# Altium PCB PCB1.PcbDoc
Units mm, origin at the board's own origin, x right, y up, seen from the top; angles counter-clockwise.
Board outline 64.64 x 85.47 mm, 2 copper layers (Top Layer, Bottom Layer); 9 components, 18 nets, 63 pads, 0 vias.
Unrouted connection lines stored in the file: 2.
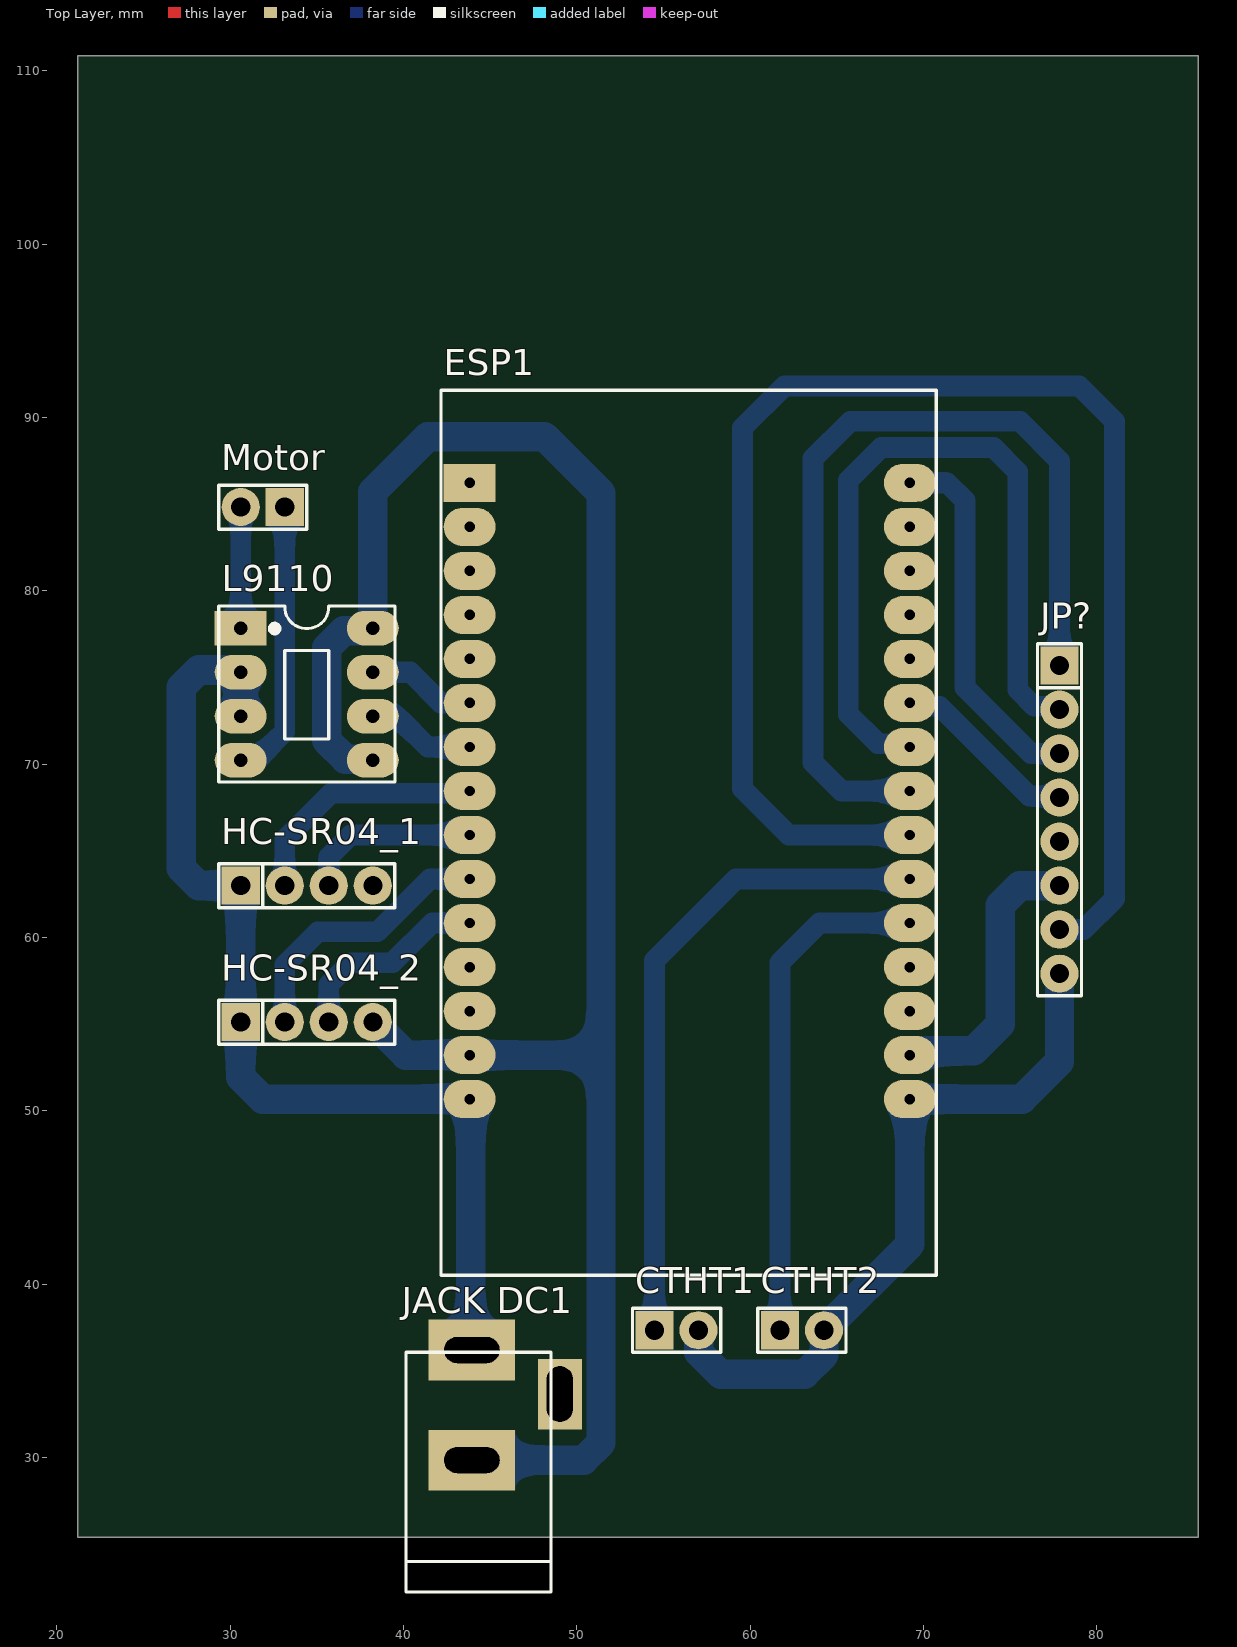
[diagram p0: Top Layer view]
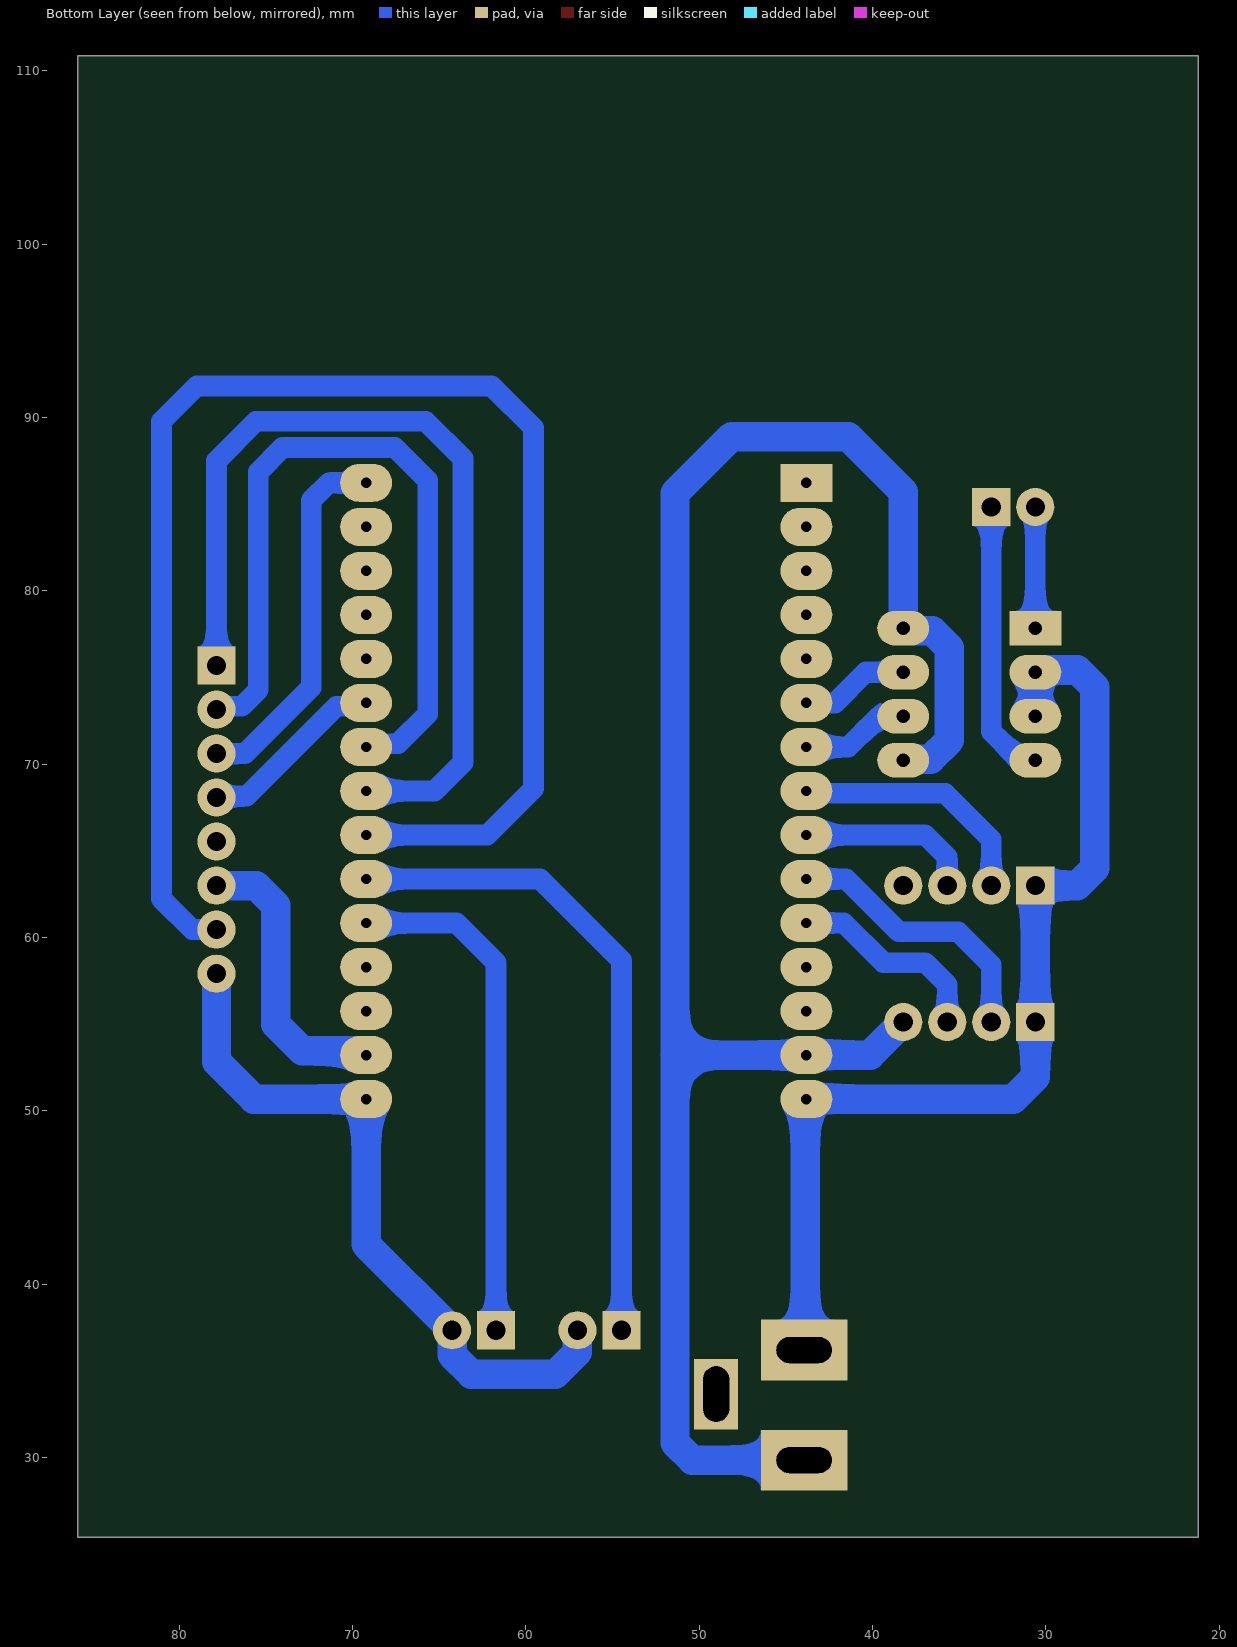
[diagram p1: Bottom Layer view, seen from below]
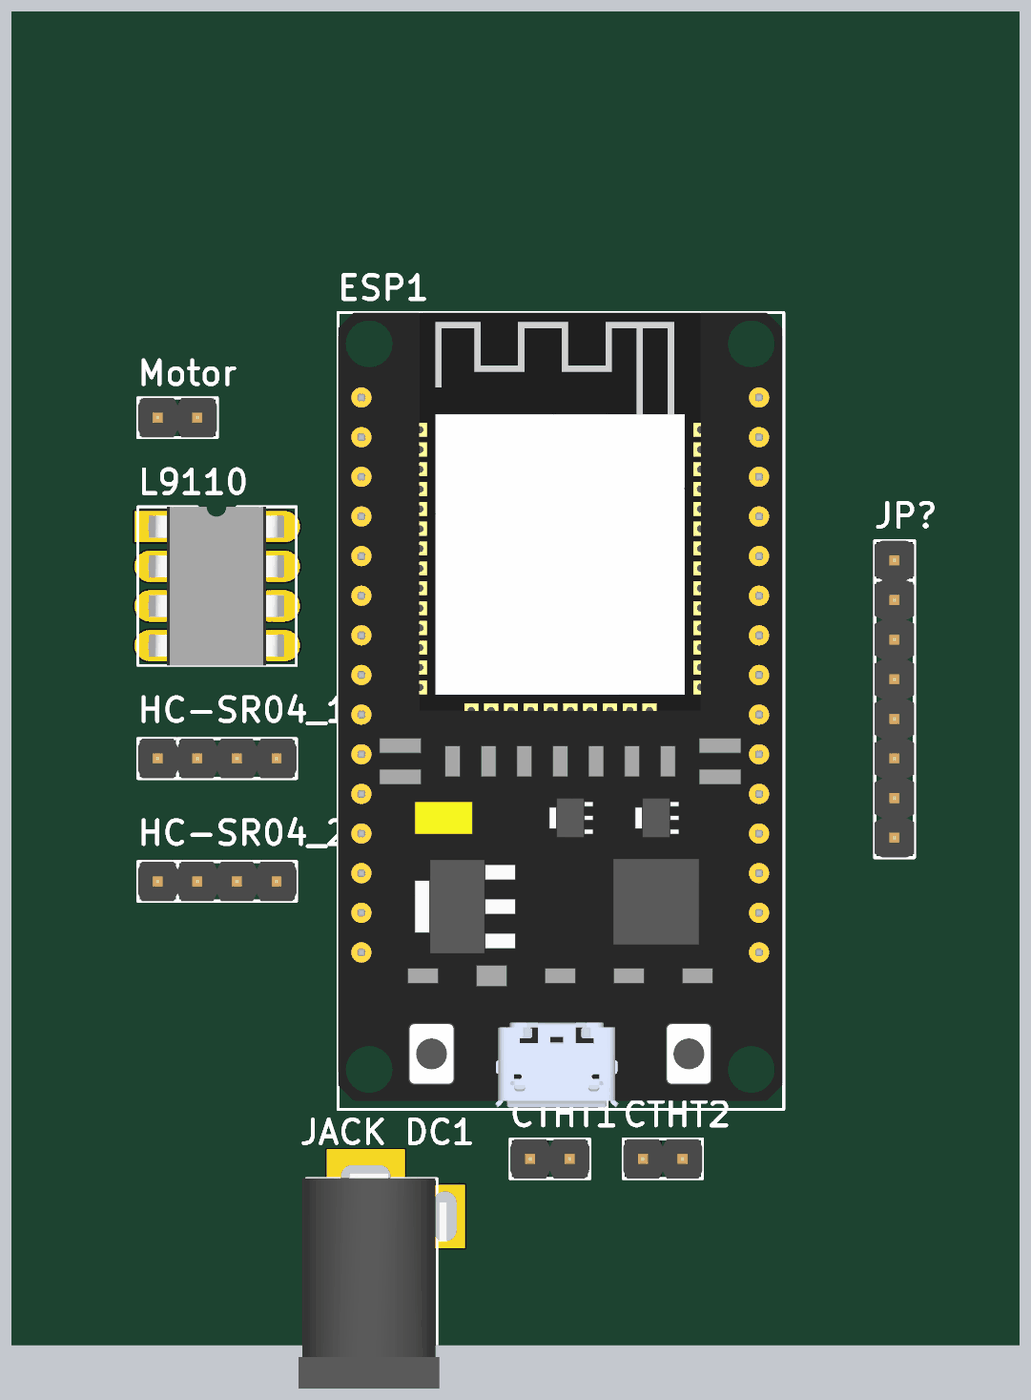
[diagram p2: 3D render of the assembled board from above, using the file's embedded part models]

## Layer stack, top to bottom
Top Solder: solder mask 0.0102, Solder Resist, Dk 3.5
Top Layer: signal copper 0.0356
Dielectric 1: dielectric 0.32, FR-4, Dk 4.8
Bottom Layer: signal copper 0.0356
Bottom Solder: solder mask 0.0102, Solder Resist, Dk 3.5

## Board outline
21.209,25.4 85.852,25.4 85.852,110.871 21.209,110.871

## Design rules (kind name [scope] priority, off if disabled: settings)
Clearance [All] p1: gap=0.254 ignorepadtopadclearanceinfootprint=FALSE except(0: Arc-Hole Track-Hole SMDPad-Hole THPad-Hole Via-Hole Fill-Hole Poly-Hole Region-Hole Text-Hole)
PolygonConnect [All] p1: connectstyle=Relief reliefconductorwidth=0.254 reliefentries=4 polygonreliefangle="90 Angle" airgapwidth=0.254
RoutingVias [All] p1: holewidth=0.711 width=1.27 viastyle="Through Hole" minholewidth=0.711 minwidth=1.27 maxholewidth=0.711 maxwidth=1.27
SolderMaskExpansion [All] p1: expansion=0.102 istentingtop=FALSE
Width [All] p1: maxlimit=1.7 minlimit=0.254 preferedwidth=1.5 toplayer_maxwidth=0.254 toplayer_prefwidth=0.254 bottomlayer_minwidth=1.2 minimp=50.000000 maximp=50.000000 favimp=50.000000
30 further rules are at their usual default settings.

## Components (designator, comment, footprint, x,y, rotation, side; value= is the part's Value field where it differs from the comment)
CTHT1 "CTHT1" "JP 1x2 DT" 54.483,37.338 r0 top
CTHT2 "CTHT2" "JP 1x2 DT" 61.722,37.338 r0 top
ESP1 "ESP32 DEVKIT" "ESP32 WROOM 32 KIT" 43.815,86.233 r0 top
HC-SR04_1 "HC-SR04_1" "JP 1x4 DT" 30.607,62.992 r0 top
HC-SR04_2 "HC-SR04_2" "JP 1x4 DT" 30.607,55.118 r0 top
"JACK DC1" "JACK DC 5.5" "JACK DC 5.5" 46.482,33.02 r90 top value="Jac DC"
JP? "JP 1x8 2.54" "JP 1x8 DT" 77.851,75.692 r270 top
L9110 "DIP8" DIP8/W0.3 30.607,77.851 r270 top
Motor "Motor" "JP 1x2 DT" 33.147,84.836 r180 top

## Footprints (in the part's own frame and the unit in brackets; to place one, negate y for a bottom-side part, rotate by r counter-clockwise, add the part's x,y. Pads: shape width x height; smd on the part's side, far side on the other; paste and mask are expansions set on the pad)
DIP8/W0.3 [mm] "8 PIN, W 300mil, Pin to pin 100mil"
  rect 2x3 hole 0.787: 1(0,0)
  oval 2x3 hole 0.787: 2(2.54,0) 3(5.08,0) 4(7.62,0) 5(7.62,7.62) 6(5.08,7.62) 7(2.54,7.62) 8(0,7.62)
  silkscreen extent -1.28,-1.27 8.89,8.89, body extent -1.27,-1.02 8.89,8.54, height 5.11
"ESP32 WROOM 32 KIT" [mm]
  rect 3x2.2 hole 0.6: 1(0,0)
  oval 3x2.2 hole 0.6: 2(0,-2.54) 3(0,-5.08) 4(0,-7.62) 5(0,-10.16) 6(0,-12.7) 7(0,-15.24) 8(0,-17.78) 9(0,-20.32) 10(0,-22.86) 11(0,-25.4) 12(0,-27.94) 13(0,-30.48) 14(0,-33.02) 15(0,-35.56) 16(25.4,-35.56) 17(25.4,-33.02) 18(25.4,-30.48) 19(25.4,-27.94) 20(25.4,-25.4) 21(25.4,-22.86) 22(25.4,-20.32) 23(25.4,-17.78) 24(25.4,-15.24) 25(25.4,-12.7) 26(25.4,-10.16) 27(25.4,-7.62) 28(25.4,-5.08) 29(25.4,-2.54) 30(25.4,0)
  silkscreen extent -1.65,-45.72 26.92,5.33, body extent -1.65,-45.6 26.85,5.33, height 10.49
"JACK DC 5.5" [mm] "Jac DC input"
  rect 3.5x5 hole 1.5 slot 3.2 at 90 deg: 1(3.175,2.54) 2(-3.175,2.54)
  rect 4.064x2.54 hole 1.5 slot 3.2 at 0 deg: 3(0.635,-2.54)
  silkscreen extent -10.79,-2.03 3.05,6.35, body extent -10.42,-2.67 3.4,6.84, height 11.02
"JP 1x2 DT" [mm] "2 pins, 1 row, straight, gold plating"
  rect 2.2x2.2 hole 1.1: 1(0,0)
  round 2.2 hole 1.1: 2(2.54,0)
  silkscreen extent -1.27,-1.27 3.81,1.27, body extent -1.27,-1.27 3.81,1.27, height 8.54
"JP 1x4 DT" [mm] "4 pins, 1 row, straight, gold plating"
  rect 2.2x2.2 hole 1.1: 1(0,0)
  round 2.2 hole 1.1: 2(2.54,0) 3(5.08,0) 4(7.62,0)
  silkscreen extent -1.27,-1.27 8.89,1.27, body extent -1.27,-1.27 8.89,1.27, height 8.54
"JP 1x8 DT" [mm] "8 pins, 1 row, straight, gold plating"
  rect 2.2x2.2 hole 1.1: 1(0,0)
  round 2.2 hole 1.1: 2(2.54,0) 3(5.08,0) 4(7.62,0) 5(10.16,0) 6(12.7,0) 7(15.24,0) 8(17.78,0)
  silkscreen extent -1.27,-1.27 19.05,1.27, body extent -1.27,-1.27 19.05,1.27, height 8.54

## Part data
CTHT1 CTHT2 Motor: library part "JP 1x2 2.54 Duc Thang", "Cắm", Chung_Loai=Cắm, Don_Vi=Con, Ma_Hang=MH000903, Ten_Linh_Kien="Jump Đơn Đực 2.54MM 1x40P Thẳng 11MM"
ESP1: library part "ESP32 WROOM 32 KIT"
HC-SR04_1 HC-SR04_2: library part "JP 1x4 2.54 Duc Thang", "Cắm", Chung_Loai=Cắm, Don_Vi=Con, Ma_Hang=MH000903, Ten_Linh_Kien="Jump Đơn Đực 2.54MM 1x40P Thẳng 11MM"
JP?: library part "JP 1x8 2.54 Duc Thang", "Cắm", Chung_Loai=Cắm, Don_Vi=Con, Ma_Hang=MH000903, Ten_Linh_Kien="Jump Đơn Đực 2.54MM 1x40P Thẳng 11MM"

## Nets (pads, with @x,y where several pads share a name; then routed paths per layer and width w, separated by ;. In a path a pad name is that pad's centre, name@x,y a point inside that pad or via, vN(x,y) a via of type N, cw(c..) or ccw(c..) an arc to the next point about the centre after c; other vN are vias at no path point)
+3.3: CTHT1.2 CTHT2.2 ESP1.16 JP?.8 | length 40.9
  Bottom Layer w1.7: CTHT1.2 57.023,36.068 58.293,34.798 63.139,34.798 64.262,35.921 CTHT2.2 69.215,42.291 ESP1.16 75.692,50.673 77.851,52.832 JP?.8
+5: "JACK DC1.1" ESP1.15 HC-SR04_1.1 HC-SR04_2.1 L9110.2 L9110.3 | length 60
  Bottom Layer w1.7: L9110.3 L9110.2 30.026,75.311 29.899,75.438 28.174,75.438 27.178,74.442 27.178,63.988 28.174,62.992 HC-SR04_1.1 HC-SR04_2.1 30.607,51.943 31.877,50.673 ESP1.15 43.878,50.609 43.878,36.258 43.942,36.195
CTHT1: CTHT1.1 ESP1.21 | length 38
  Bottom Layer w1.2: CTHT1.1 54.483,58.674 59.182,63.373 ESP1.21
CTHT2: CTHT2.1 ESP1.20 | length 29.6
  Bottom Layer w1.2: CTHT2.1 61.722,58.547 64.008,60.833 ESP1.20
Echo1: ESP1.9 HC-SR04_1.3 | length 10.3
  Bottom Layer w1.2: HC-SR04_1.3 35.687,64.643 36.957,65.913 ESP1.9
Echo2: ESP1.11 HC-SR04_2.3 | length 11.8
  Bottom Layer w1.2: HC-SR04_2.3 35.687,57.277 36.957,58.547 39.37,58.547 41.656,60.833 ESP1.11
GND: "JACK DC1.2" ESP1.14 ESP1.17 HC-SR04_1.4 HC-SR04_2.4 JP?.6 L9110.5 L9110.8 | length 128.4
  Bottom Layer w1.7: L9110.8@37.934,77.851 37.646,77.851 37.496,77.701 36.556,77.701 35.56,76.705 35.56,71.377 36.648,70.288 38.17,70.288 L9110.5 ; HC-SR04_2.4 40.132,53.213 ESP1.14 51.396,53.213 ; L9110.8 38.227,85.725 41.402,88.9 48.133,88.9 51.396,85.637 51.396,53.213 ; 43.942,29.845 50.4,29.845 51.396,30.841 51.396,53.213 ; ESP1.17 69.465,53.463 72.894,53.463 74.422,54.991 74.422,61.849 75.565,62.992 JP?.6
IN1: ESP1.6 L9110.7 | length 6.3
  Bottom Layer w1.2: L9110.7 40.386,75.311 42.164,73.533 ESP1.6
IN2: ESP1.7 L9110.6 | length 6.3
  Bottom Layer w1.2: L9110.6 38.289,72.709 39.686,72.709 41.402,70.993 ESP1.7
MISO: ESP1.25 JP?.4 | length 10.9
  Bottom Layer w1.2: ESP1.25 69.406,73.342 70.93,73.342 76.125,68.147 77.776,68.147 JP?.4
MOSI: ESP1.30 JP?.3 | length 21.4
  Bottom Layer w1.2: ESP1.30 71.374,86.233 72.39,85.217 72.39,74.422 76.2,70.612 JP?.3
NetL9110_1: L9110.1 Motor.2 | length 7
  Bottom Layer w1.2: L9110.1 Motor.2
NetL9110_4: L9110.4 Motor.1 | length 16.2
  Bottom Layer w1.2: L9110.4 30.722,70.346 31.611,70.346 33.147,71.882 Motor.1
RST: ESP1.22 JP?.7 | length 86.4
  Bottom Layer w1.2: ESP1.22 62.23,65.913 59.563,68.58 59.563,89.408 61.976,91.821 78.994,91.821 81.026,89.789 81.026,62.23 79.248,60.452 JP?.7
SCK: ESP1.24 JP?.2 | length 44.4
  Bottom Layer w1.2: ESP1.24 69.024,71.184 67.373,71.184 65.659,72.898 65.659,86.36 67.564,88.265 74.041,88.265 75.438,86.868 75.438,74.295 76.39,73.343 77.66,73.343 JP?.2
SDA: ESP1.23 JP?.1 | length 51.7
  Bottom Layer w1.2: ESP1.23 65.278,68.453 63.627,70.104 63.627,87.63 65.786,89.789 75.565,89.789 77.851,87.503 JP?.1
Trig1: ESP1.8 HC-SR04_1.2 | length 14.5
  Bottom Layer w1.2: HC-SR04_1.2 33.147,65.659 35.814,68.326 43.688,68.326 ESP1.8
Trig2: ESP1.10 HC-SR04_2.2 | length 16
  Bottom Layer w1.2: HC-SR04_2.2 33.147,58.42 35.052,60.325 38.481,60.325 41.529,63.373 ESP1.10
pads on no net: "JACK DC1.3" ESP1.1 ESP1.2 ESP1.3 ESP1.4 ESP1.5 ESP1.12 ESP1.13 ESP1.18 ESP1.19 ESP1.26 ESP1.27 ESP1.28 ESP1.29 JP?.5